# EAGLE board SAMD21 (EAGLE 6.5.0)
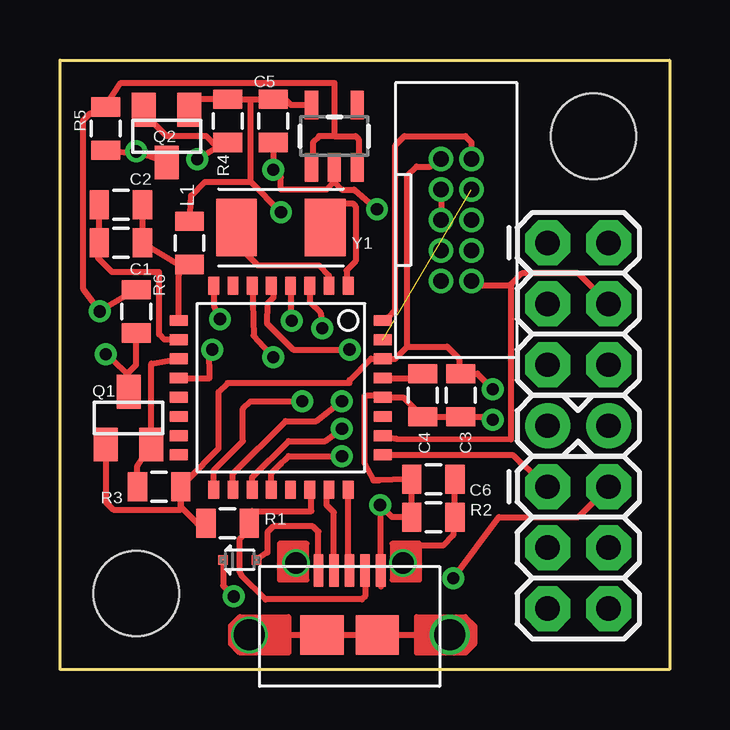
[diagram p0: board, top side]
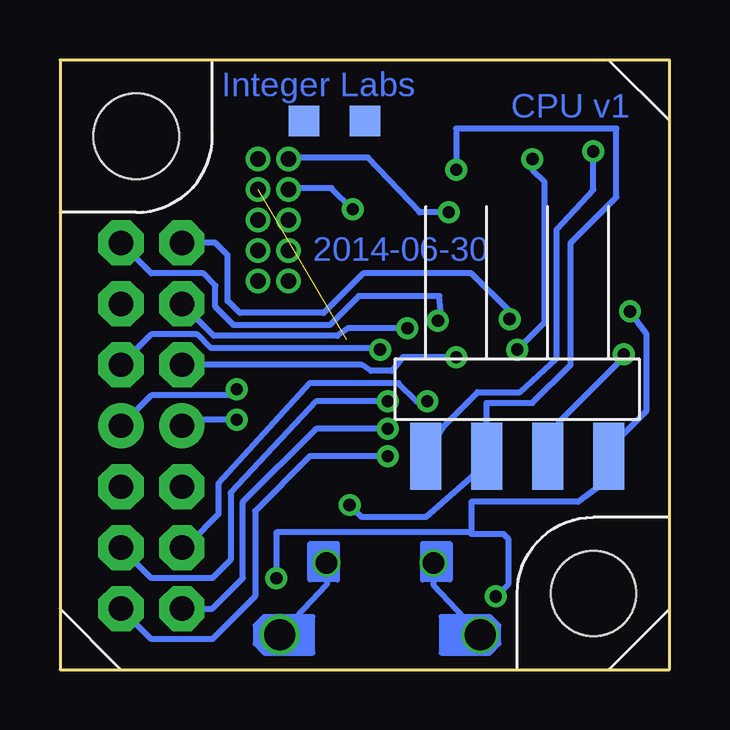
[diagram p1: board, bottom side, seen from below]

Size 25.4 x 25.4 mm. Coordinates in mm from the lower left corner, seen from the top.
Copper layers (1*16): Top 0.0178mm / dielectric 59mil / Bottom 0.0178mm
Design rules "SSC-EAGLE-2Lyr_v1.0.0.3 *": minimum track width 6mil, minimum drill 14mil, track to track 6mil, track to pad 6mil, pad to pad 6mil, via to via 6mil, smd to smd 6mil, copper to edge 20mil, drill to drill 16mil, minimum pad ring 1mil, minimum via ring 8mil, stop-mask expansion 3mil, vias tented up to drill 0mil, thermal gap 10mil

## Footprints (pad centres in the part's own frame; a part is rotated, then mirrored left to right if it is on the bottom)
0805 = smd 0.8 x 1.2: 1 -0.9,0; 2 0.9,0
SOD-523 = smd 0.4 x 0.4: A -0.7,0; C 0.7,0
1X02 = drill 1.016 pad 1.88: 1 0,0; 2 2.54,0
2X3 = drill 1.016 pad 1.88 octagon: 1 0,0; 2 0,2.54; 3 2.54,0; 4 2.54,2.54; 5 5.08,0; 6 5.08,2.54
SOT23 = smd 1 x 1.4: 1 -0.95,-1.1; 2 0.95,-1.1; 3 0,1.1
TQFP-32 = smd 0.75 x 0.45: 1 -4.25,2.8; 2 -4.25,2; 3 -4.25,1.2; 4 -4.25,0.4; 5 -4.25,-0.4; 6 -4.25,-1.2; 7 -4.25,-2; 8 -4.25,-2.8; 17 4.25,-2.8; 18 4.25,-2; 19 4.25,-1.2; 20 4.25,-0.4; 21 4.25,0.4; 22 4.25,1.2; 23 4.25,2; 24 4.25,2.8 | smd 0.45 x 0.75: 9 -2.8,-4.25; 10 -2,-4.25; 11 -1.2,-4.25; 12 -0.4,-4.25; 13 0.4,-4.25; 14 1.2,-4.25; 15 2,-4.25; 16 2.8,-4.25; 25 2.8,4.25; 26 2,4.25; 27 1.2,4.25; 28 0.4,4.25; 29 -0.4,4.25; 30 -1.2,4.25; 31 -2,4.25; 32 -2.8,4.25
SOT23-5 = smd 0.55 x 1.2: 1 -0.95,-1.3; 2 0,-1.3; 3 0.95,-1.3; 4 0.95,1.3; 5 -0.95,1.3
MOLEX-MICROAB = smd 0.4 x 1.35: 1 -1.3,2.675; 2 -0.65,2.675; 3 0,2.675; 4 0.65,2.675; 5 1.3,2.675 | drill 0.889 pad 1.143: S1 -2.225,3; S2 2.225,3 | drill 1.3 pad 1.524: S3 -4.175,0 | smd 1.8 x 1.651: S4 -1.15,0; S5 1.15,0 | drill 1.3 pad 1.676: S6 4.175,0
FOOTPRINT = smd 1.27 x 1.27 bottom: MISO 15.24,22.86; RESET 12.7,22.86 | smd 1.295 x 2.794 bottom: P$1 2.54,8.89; P$2 5.08,8.89; P$3 7.62,8.89; P$4 10.16,8.89 | hole 3.556: 22.225,22.225; 3.175,3.175
HEADER-10-.05 = drill 0.635 pad 1.016: 1 -2.54,-0.635; 2 -1.27,-0.635; 3 0,-0.635; 4 1.27,-0.635; 5 2.54,-0.635; 6 2.54,0.635; 7 1.27,0.635; 8 0,0.635; 9 -1.27,0.635; 10 -2.54,0.635
CRYSTAL-TXC-7A = smd 1.7 x 2.4: P$1 1.85,0; P$2 -1.85,0

## Placement (x,y rotation side)
C1  .1uF  [0805]  2.54,17.78 180 top
C2  10uF  [0805]  2.54,19.37 180 top
C3  .1uF  [0805]  16.7,11.43 270 top
C4  .1uF  [0805]  15.11,11.43 270 top
C5  10uF  [0805]  8.89,22.86 270 top
C6  4.5nF  [0805]  15.56,7.94 180 top
D1  DIODE-SCHOTTKY  [SOD-523]  7.49,4.57 180 top
JP3  M02PTH  [1X02]  20.32,10.16 0 top
JP4  [2X3]  20.32,17.78 270 top
JP6  [2X3]  20.32,7.62 270 top
L1  [0805]  5.4,17.78 90 top
Q1  BSS138  [SOT23]  2.86,10.48 0 top
Q2  BSS138  [SOT23]  4.45,22.23 180 top
R1  [0805]  6.99,6.1 0 top
R2  1M  [0805]  15.56,6.35 0 top
R3  1k  [0805]  4.13,7.62 180 top
R4  1k  [0805]  6.99,22.86 270 top
R5  1k  [0805]  1.91,22.54 90 top
R6  1k  [0805]  3.17,14.92 90 top
U$1  SAMD21E  [TQFP-32]  9.21,11.75 270 top
U$2  MIC5205-3.3  [SOT23-5]  11.43,22.23 0 top
U$3  USB-MICRO-AB  [MOLEX-MICROAB]  12.06,1.45 0 top
U$4  FOOTPRINT  [FOOTPRINT]  0,0 0 top
U$5  CORTEX-DEBUG  [HEADER-10-.05]  16.51,18.73 270 top
Y1  [CRYSTAL-TXC-7A]  9.21,18.41 180 top

## Library data of the parts
C1-C6 = SparkFun-Capacitors
D1 = SparkFun-DiscreteSemi
JP3 JP4 JP6 = SparkFun-Connectors
L1 = SparkFun-Passives
Q1 Q2 = SparkFun-DiscreteSemi; PROD_ID: TRANS-00830
R1-R6 = SparkFun-Resistors
U$1 U$3-U$5 = IntegerLabs
U$2 = SparkFun-PowerIC; PROD_ID: VREG-00822
Y1 = SparkFun-FreqCtrl

## Nets
+3.3V: C3.1 C5.1 JP3.2 L1.2 Q1.1 Q2.1 R1.1 R3.1 R4.1 U$1.30 U$2.5 U$5.1
+5V: D1.C JP6.2 R5.2 R6.2 U$2.1 U$2.3 U$4.P$1
A2: JP4.3 U$1.3
A3: JP4.2 U$1.4
A4: JP4.6 U$1.5
A5: JP4.5 U$1.6
A7: JP4.1 U$1.8
A16: JP6.3 U$1.17
A17: JP6.4 U$1.18
A18: JP6.5 U$1.19
A19: JP6.6 U$1.20
A27: JP6.1 U$1.25
D+: U$1.24 U$3.3
D-: U$1.23 U$3.2
GND: C3.2 C4.2 C5.2 C6.2 JP3.1 R2.1 U$1.28 U$2.2 U$3.5 U$4.P$3 U$5.2 U$5.3
N$1: C1.1 C2.1 L1.1 U$1.9
N$2: C1.2 C2.2 U$1.10
N$3: C6.1 R2.2 U$3.S1 U$3.S2 U$3.S3 U$3.S4 U$3.S5 U$3.S6
N$4: D1.A U$3.1
N$5: C4.1 U$1.29
N$7: U$1.1 Y1.P$2
N$8: U$1.2 Y1.P$1
RESETN: JP4.4 U$1.26 U$5.6
SCL: Q2.3 R5.1 U$4.P$4
SCL3.3: Q2.2 R4.2 U$1.12
SDA: Q1.3 R6.1 U$4.P$2
SDA3.3: Q1.2 R3.2 U$1.11
SWDCLK: U$1.31 U$5.9
SWDIO: U$1.32 U$5.10
USB-ID: R1.2 U$1.22 U$3.4

## Tracks (layer width: path | path; a pad name or v marks a point on that pad's centre or on a via)
+3.3V  (via drill 0.51)
  Top 0.254: Q2.1 5.39,23.76 R4.1 7.94,23.76 | 7.94,23.76 C5.1 8.97,23.84 9.27,23.88 9.62,23.52 U$2.5 | L1.2 5.46,19.75 6.03,20.32 7.94,20.32 | 7.94,20.32 7.94,23.76 | Q1.1 1.91,6.98 2.22,6.67 5.03,6.67 R3.1 | 6.08,6.3 R1.1 5.71,6.1 5.03,6.78 R3.1 | v9.21,19.05 7.94,20.32 | R3.1 5.03,7.94 5.33,7.94 6.6,9.21 6.6,11.56 6.99,11.94 12.06,11.94 12.06,12.06 12.95,12.95 U$1.30 13.96,12.95 14.48,13.46 | 14.48,13.46 14.48,20.57 14.86,20.95 15.43,20.95 U$5.1 | 14.48,13.46 16.13,13.46 16.64,12.95 16.64,12.39 C3.1 17.39,12.33 v18.03,11.68
  Bottom 0.254: v9.21,19.05 10.41,19.05 12.57,21.34 15.81,21.34 U$5.1 | v18.03,11.68 18.29,11.43 21.59,11.43 JP3.2
+5V  (via drill 0.51)
  Top 0.254: 11.43,22.23 11.43,24.45 2.54,24.45 1.91,23.5 R5.2 1.85,23.18 1.27,23.18 0.95,22.86 0.95,15.88 v1.65,14.92 R6.2 | 11.43,22.23 10.79,22.23 10.54,21.97 10.54,21.34 10.48,21.27 U$2.1 | 11.43,22.23 12.32,22.23 12.45,22.1 12.45,21.34 12.38,21.27 U$2.3 | v16.38,3.81 18.29,6.35 21.59,6.35 JP6.2 | D1.C 6.79,3.49 v7.24,3.05
  Bottom 0.254: 8.26,5.65 8.26,6.99 3.81,6.99 2.54,7.94 U$4.P$1 2.54,9.21 0.95,10.79 0.95,13.97 v1.65,14.92 | v16.38,3.81 16.38,5.71 8.32,5.71 8.26,5.65 | 8.26,5.65 6.92,5.65 6.73,5.46 6.73,3.56 v7.24,3.05
A2  (via drill 0.51)
  Top 0.254: U$1.3 10.41,15.31 10.86,14.86 v10.92,14.22
  Bottom 0.254: v10.92,14.22 13.4,14.22 13.84,13.91 18.99,13.91 JP4.3
A3  (via drill 0.51)
  Top 0.254: U$1.4 9.61,14.84 v9.65,14.54
  Bottom 0.254: v9.65,14.54 9.53,14.73 9.59,15.56 12.95,15.56 14.16,14.35 18.16,14.35 18.92,15.11 18.92,16 19.43,16.51 21.59,16.51 JP4.2
A4  (via drill 0.51)
  Top 0.254: U$1.5 8.89,16 8.89,15.49 8.64,15.24 8.62,14.43 9.72,13.34 v12.06,13.34
  Bottom 0.254: v12.06,13.34 11.94,13.34 12.38,13.4 19.11,13.4 19.68,13.97 21.59,13.97 JP4.6
A5  (via drill 0.51)
  Top 0.254: U$1.6 8.07,13.91 v8.89,13.02
  Bottom 0.254: v8.89,13.02 11.11,13.02 11.56,12.45 12.45,12.45 12.83,12.7 JP4.5
A7  (via drill 0.51)
  Top 0.254: U$1.8 6.41,15.18 v6.67,14.61
  Bottom 0.254: v6.67,14.61 6.67,14.92 8.26,16.51 12.76,16.51 14.41,14.86 17.91,14.86 18.41,15.37 18.41,17.27 18.92,17.78 JP4.1
A16  (via drill 0.51)
  Top 0.254: U$1.17 6.41,8.31 7.62,9.53 7.62,10.86 7.94,11.18 v10.1,11.18
  Bottom 0.254: v10.1,11.18 10.54,11.18 11.3,11.94 14.99,11.94 18.8,7.75 18.8,6.48 19.94,5.33 20.07,5.33 JP6.3
A17  (via drill 0.51)
  Top 0.254: U$1.18 7.21,8.16 9.4,10.35 10.67,10.35 v11.75,11.18
  Bottom 0.254: v11.75,11.18 14.73,11.18 18.29,7.37 18.29,4.57 19.05,3.81 21.59,3.81 JP6.4
A18  (via drill 0.51)
  Top 0.254: U$1.19 8.01,8.01 9.53,9.53 11.05,9.53 v11.75,10.03
  Bottom 0.254: v11.75,10.03 14.73,10.03 17.78,6.99 17.78,3.81 19.05,2.54 JP6.5
A19  (via drill 0.51)
  Top 0.254: U$1.20 8.81,8.17 9.21,8.57 9.4,8.76 9.53,8.89 v11.75,8.89
  Bottom 0.254: v11.75,8.89 14.99,8.89 17.27,6.6 17.27,3.05 19.05,1.27 21.59,1.27 JP6.6
A27
  Top 0.254: U$1.25 18.85,8.95 18.92,8.89 19.18,8.64 JP6.1
D+
  Top 0.254: 12.06,7.44 U$1.24 12.01,6.86 12,4.83 12.06,4.64 12.06,4.45 12.01,4.26 U$3.3
D-
  Top 0.254: U$1.23 11.11,7.4 11.11,6.86 11.41,6.56 U$3.2
GND  (via drill 0.51)
  Top 0.254: 11.43,20.32 11.11,20 9.21,20 9.21,20.51 v8.89,20.83 C5.2 | 13.07,7.88 C6.2 R2.1 13.84,6.35 v13.34,6.86 13.37,6.83 U$3.5 13.37,3.46 | 13.07,7.88 13.28,7.88 | 13.07,7.88 12.7,8.57 12.7,11.43 13.06,11.43 U$1.28 14.3,11.35 C4.2 C3.2 17.92,10.53 v18.03,10.41 | U$2.2 11.43,20.32 | 11.43,20.32 11.75,20 12.26,20 v13.21,19.18 | U$5.2 U$5.3
  Bottom 0.254: v13.34,6.86 12.83,6.35 10.16,6.35 7.62,8.57 U$4.P$3 7.62,11.11 5.71,11.11 4.13,12.7 4.13,17.78 2.22,19.68 2.22,22.54 8.89,22.54 v8.89,20.83 | v18.03,10.41 20.07,10.41 JP3.1 | v13.21,19.18 14.1,20.07 15.81,20.07 U$5.2
N$1
  Top 0.254: C2.1 C1.1 5.03,16.83 | 5.03,16.83 L1.1 | U$1.9 4.96,16.44 5.03,16.83
N$2
  Top 0.254: U$1.10 4.35,13.75 4.13,13.97 4.13,16.56 2.17,16.56 1.59,17.14 C1.2 C2.2
N$3
  Top 0.254: C6.1 R2.2 16.38,5.59 15.96,5.17 14.87,5.17 U$3.S2 | U$3.S3 U$3.S4 U$3.S5 U$3.S6
  Bottom 0.254: U$3.S2 14.29,3.54 U$3.S6 | U$3.S1 9.84,3.54 U$3.S3
N$4
  Top 0.254: U$3.1 10.77,5.75 10.54,5.97 8.89,5.97 8.64,5.71 8.64,4.89 D1.A
N$5
  Top 0.254: U$1.29 14.93,12.15 C4.1
N$7
  Top 0.254: Y1.P$2 11.06,18.93 11.56,19.43 12.19,19.43 12.32,19.3 12.32,17.02 11.94,16.64 11.94,16.07 U$1.1
N$8
  Top 0.254: U$1.2 11.21,16.41 10.79,16.83 8.26,16.83 7.3,17.78 7.3,18.15 Y1.P$1
RESETN
  Top 0.254: U$1.26 14,9.62 18.8,9.59 18.8,16 | 18.8,16 18.8,16.07 19.24,16.51 21.59,16.51 JP4.4 | 18.8,16 17.4,16 17.21,16.19 U$5.6
SCL  (via drill 0.51)
  Top 0.254: R5.1 4.25,21.32 Q2.3 v3.17,21.59
  Bottom 0.254: U$4.P$4 9.4,10.16 8,11.56 6.22,11.56 4.7,12.95 4.7,18.35 3.17,20 v3.17,21.59
SCL3.3  (via drill 0.51)
  Top 0.254: R4.2 6.54,21.77 | 6.54,21.77 6.08,22.23 4.45,22.23 3.5,23.18 Q2.2 | U$1.12 6.23,12.15 6.22,13.3 v6.35,13.34 | v5.71,21.27 6.54,21.77
  Bottom 0.254: v6.35,13.34 5.21,14.48 5.21,20.32 5.71,20.83 v5.71,21.27
SDA  (via drill 0.51)
  Top 0.254: R6.1 3.17,12.7 2.79,12.32 Q1.3 2.86,12.26 2.16,12.95 v1.91,13.14
  Bottom 0.254: U$4.P$2 4.57,10.35 1.97,12.95 1.97,13.08 v1.91,13.14
SDA3.3
  Top 0.254: R3.2 3.23,8.48 Q1.2 3.81,12.75 U$1.11
SWDCLK  (1 unrouted)
SWDIO
  Top 0.254: U$1.32 13.52,14.61 13.2,14.47 13.65,14.61 13.65,14.67 13.97,14.99 13.97,21.84 14.35,22.23 16.89,22.23 17.14,21.97 U$5.10
USB-ID
  Top 0.254: U$1.22 10.48,7.43 10.48,6.6 8,6.6 7.88,6.23 R1.2 7.62,6.35 7.99,6.4 7.81,6.4 7.81,5.78 7.49,5.46 7.49,4.06 7.56,3.94 8.57,2.92 12.57,2.92 12.71,3.06 U$3.4

## Text on the board
Bottom: Integer Labs | CPU v1 | 2014-06-30